# EAGLE board disp_adapter (EAGLE 5.07)
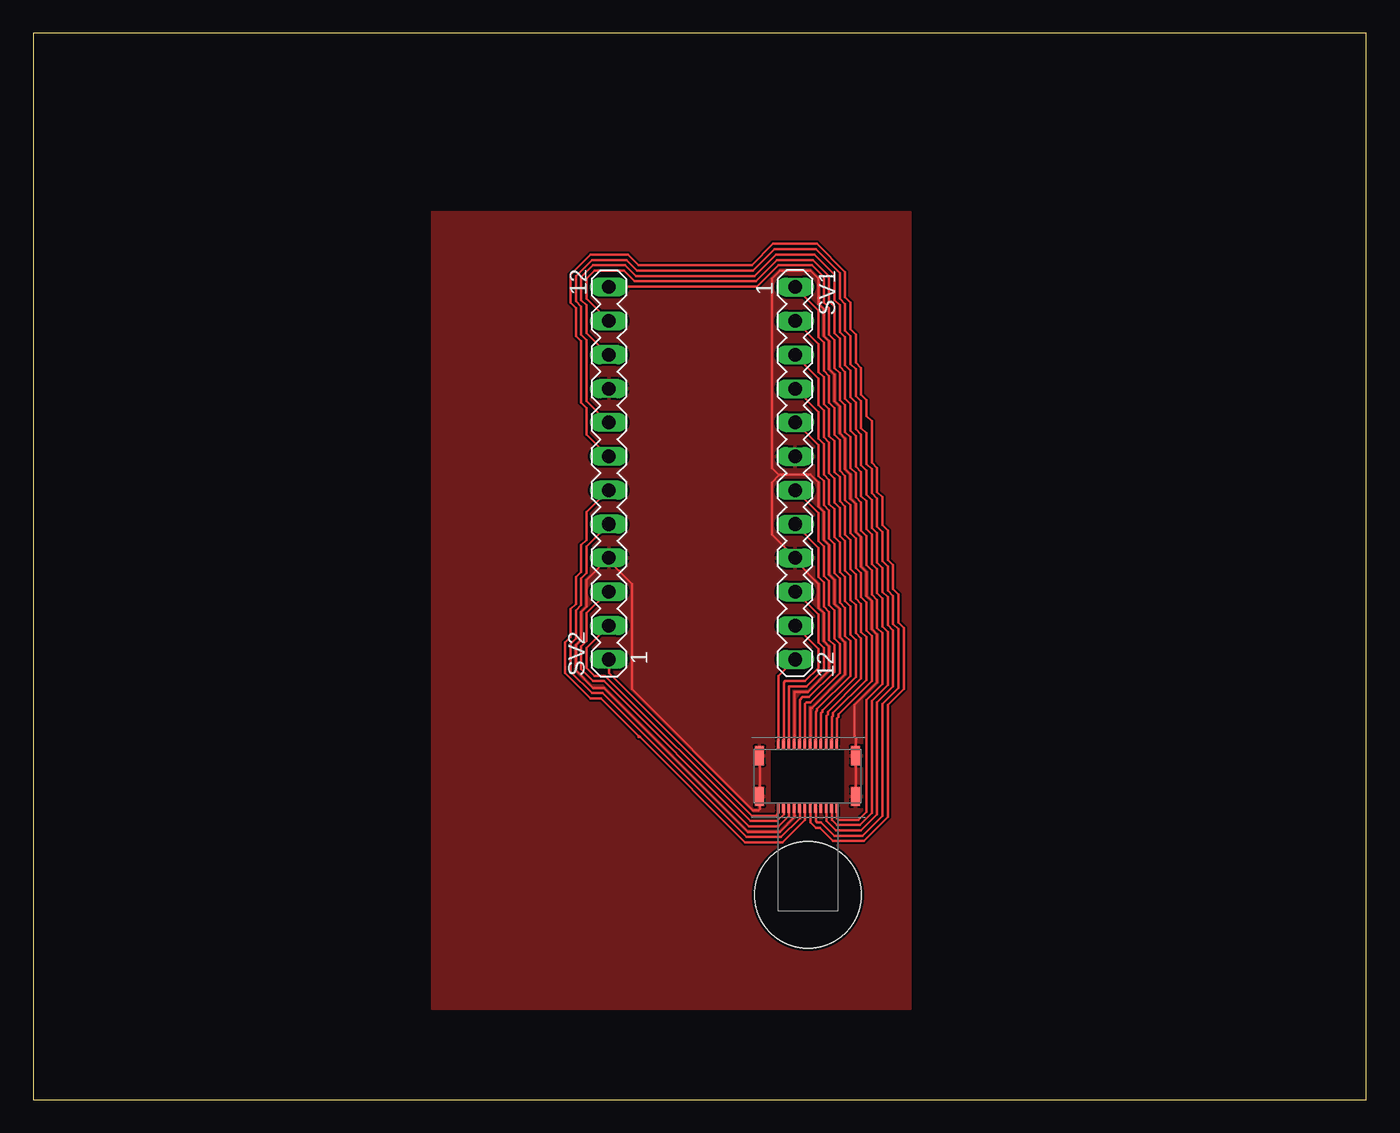
[diagram p0: board, top side]

Size 100 x 80 mm. Coordinates in mm from the lower left corner, seen from the top.
Outline: 0,0 100,0 100,80 0,80 0,0
Copper layers (1*16): Top 0.035mm / dielectric 1.5mm / Bottom 0.035mm
Design rules "Fischer-LP": minimum track width 0.15mm, minimum drill 0.3mm, track to track 0.15mm, track to pad 0.15mm, pad to pad 0.15mm, via to via 0.15mm, smd to smd 0mil, copper to edge 0.2mm, drill to drill 0.3mm, minimum pad ring 0.2mm, minimum via ring 0.15mm, stop-mask expansion 0.15mm, vias tented up to drill 0.5mm, thermal gap 0.15mm
Net classes: 0 default: width 0.2 mm

## Footprints (pad centres in the part's own frame; a part is rotated, then mirrored left to right if it is on the bottom)
MA12-1 = drill 1.016 long: 1 -13.97,0; 2 -11.43,0; 3 -8.89,0; 4 -6.35,0; 5 -3.81,0; 6 -1.27,0; 7 1.27,0; 8 3.81,0; 9 6.35,0; 10 8.89,0; 11 11.43,0; 12 13.97,0
SONY_ACX559AKN-7_A = smd 0.2 x 0.7: P$1 0,0; P$2 0.4,0; P$3 0.8,0; P$4 1.2,0; P$5 1.6,0; P$6 2,0; P$7 2.4,0; P$8 2.8,0; P$9 3.2,0; P$10 3.6,0; P$11 4,0; P$12 4.4,0; P$13 4.4,-4.8; P$14 4,-4.8; P$15 3.6,-4.8; P$16 3.2,-4.8; P$17 2.8,-4.8; P$18 2.4,-4.8; P$19 2,-4.8; P$20 1.6,-4.8; P$21 1.2,-4.8; P$22 0.8,-4.8; P$23 0.4,-4.8; P$24 0,-4.8 | smd 0.7 x 1.45: P$25 5.8,-0.875; P$26 5.8,-3.925; P$27 -1.4,-3.925; P$28 -1.4,-0.875 | hole 8: 2.25,-11.3

## Placement (x,y rotation side)
SV1  [MA12-1]  57.15,46.99 270 top
SV2  [MA12-1]  43.18,46.99 90 top
U$1  SONY_ACX559AKN-7DN  [SONY_ACX559AKN-7_A]  55.88,26.67 0 top

## Library data of the parts
SV1 SV2 = con-lstb
U$1 = Fabian

## Nets
N$1: SV1.1 U$1.P$12
N$2: SV1.2 U$1.P$11
N$3: SV1.3 U$1.P$10
N$4: SV1.4 U$1.P$9
N$5: SV1.5 U$1.P$8
N$7: SV1.7 U$1.P$6
N$8: SV1.8 U$1.P$5
N$10: SV1.10 U$1.P$3
N$11: SV1.11 U$1.P$2
N$12: SV1.12 U$1.P$1
N$13: SV2.1 U$1.P$24
N$14: SV2.2 U$1.P$23
N$15: SV2.3 U$1.P$22
N$17: SV2.5 U$1.P$20
N$18: SV2.6 U$1.P$19
N$19: SV2.7 U$1.P$18
N$20: SV2.8 U$1.P$17
N$21: SV1.6 SV1.9 SV2.4 SV2.9 U$1.P$4 U$1.P$7 U$1.P$16 U$1.P$21 U$1.P$25 U$1.P$26 U$1.P$27 U$1.P$28
N$22: SV2.10 U$1.P$15
N$23: SV2.11 U$1.P$14
N$24: SV2.12 U$1.P$13

## Tracks (layer width: path | path; a pad name or v marks a point on that pad's centre or on a via)
N$1
  Top 0.2: U$1.P$12 60.3,26.7 60.3,28.6 60.4,28.7 60.4,28.9 62.9,31.4 62.9,34.8 62.5,35.2 62.5,37.3 62.1,37.7 62.1,39.5 61.7,39.9 61.7,42.1 61.3,42.5 61.3,44.6 60.9,45 60.9,46.8 60.5,47.2 60.5,49.5 60.1,49.9 60.1,51.9 59.7,52.3 59.7,54.3 59.3,54.7 59.3,56.8 58.9,57.2 58.9,59.2 57.2,60.9 SV1.1
N$2
  Top 0.2: U$1.P$11 59.9,26.7 59.9,28.7 60,28.8 60,29 62.5,31.5 62.5,34.7 62.1,35.1 62.1,37.2 61.7,37.6 61.7,39.4 61.3,39.8 61.3,42 60.9,42.4 60.9,44.5 60.5,44.9 60.5,46.7 60.1,47.1 60.1,49.4 59.7,49.8 59.7,51.8 59.3,52.2 59.3,54.2 58.9,54.6 58.9,56.7 57.2,58.4 SV1.2
N$3
  Top 0.2: U$1.P$10 59.5,26.7 59.5,28.8 59.6,28.9 59.6,29.1 62.1,31.6 62.1,34.6 61.7,35 61.7,37.1 61.3,37.5 61.3,39.3 60.9,39.7 60.9,41.9 60.5,42.3 60.5,44.4 60.1,44.8 60.1,46.6 59.7,47 59.7,49.3 59.3,49.7 59.3,51.7 58.9,52.1 58.9,54.1 57.2,55.8 SV1.3
N$4
  Top 0.2: U$1.P$9 59.1,26.7 59.1,29 59.2,29.1 59.2,29.2 61.7,31.7 61.7,34.5 61.3,34.9 61.3,37 60.9,37.4 60.9,39.2 60.5,39.6 60.5,41.8 60.1,42.2 60.1,44.3 59.7,44.7 59.7,46.5 59.3,46.9 59.3,49.2 58.9,49.6 58.9,51.6 57.2,53.3 SV1.4
N$5
  Top 0.2: U$1.P$8 58.7,26.7 58.7,29.1 58.8,29.2 58.8,29.3 61.3,31.8 61.3,34.4 60.9,34.8 60.9,36.9 60.5,37.3 60.5,39.1 60.1,39.5 60.1,41.7 59.7,42.1 59.7,44.2 59.3,44.6 59.3,46.4 58.9,46.8 58.9,49.1 57.2,50.8 SV1.5
N$7
  Top 0.2: U$1.P$6 57.9,26.7 57.9,29.7 58,29.8 58.3,29.8 60.5,32 60.5,34.2 60.1,34.6 60.1,36.7 59.7,37.1 59.7,38.9 59.3,39.3 59.3,41.5 58.9,41.9 58.9,44 57.2,45.7 SV1.7
N$8
  Top 0.2: U$1.P$5 57.5,26.7 57.5,30 57.7,30.2 58.2,30.2 60.1,32.1 60.1,34.1 59.7,34.5 59.7,36.6 59.3,37 59.3,38.8 58.9,39.2 58.9,41.4 57.2,43.1 SV1.8
N$10
  Top 0.2: U$1.P$3 56.7,26.7 56.7,31 58,31 59.3,32.3 59.3,33.9 58.9,34.3 58.9,36.4 57.2,38.1 SV1.10
N$11
  Top 0.2: U$1.P$2 56.3,26.7 56.3,31.3 56.4,31.4 57.9,31.4 58.9,32.4 58.9,33.8 57.2,35.5 SV1.11
N$12
  Top 0.2: U$1.P$1 55.9,26.7 55.9,31.8 57.1,33 SV1.12
N$13
  Top 0.2: SV2.1 43.2,33 43.2,32 53.9,21.3 55.7,21.3 55.9,21.5 55.9,21.8 U$1.P$24
N$14
  Top 0.2: U$1.P$23 56.3,21.8 56.3,21.4 55.8,20.9 53.8,20.9 42.9,31.8 42.1,31.8 41.5,32.4 41.5,33.9 43.1,35.5 SV2.2
N$15
  Top 0.2: U$1.P$22 56.7,21.8 56.7,21.3 55.9,20.5 53.7,20.5 42.8,31.4 42,31.4 41.1,32.3 41.1,34 41.5,34.4 41.5,36.5 43.1,38.1 SV2.3
N$17
  Top 0.2: U$1.P$20 57.5,21.8 57.5,21.1 56.1,19.7 53.5,19.7 42.7,30.5 41.9,30.5 40.3,32.1 40.3,34.2 40.7,34.6 40.7,36.7 41.1,37.1 41.1,39.1 41.5,39.5 41.5,41.5 SV2.5
N$18
  Top 0.2: U$1.P$19 57.9,21.8 57.9,21 56.2,19.3 53.4,19.3 45.5,27.2 45.4,27.2 45.4,27.3 42.6,30.1 41.8,30.1 39.9,32 39.9,34.3 40.3,34.7 40.3,36.8 40.7,37.2 40.7,39.2 41.1,39.6 41.1,41.6 41.5,42 41.5,44.1 43.1,45.7 SV2.6
N$19
  Top 0.2: U$1.P$18 58.3,21.8 58.3,20.8 58.7,20.4 59,20.4 60,19.4 62.3,19.4 64.1,21.2 64.1,29.6 65.3,30.8 65.3,35.4 64.9,35.8 64.9,37.9 64.5,38.3 64.5,40.1 64.1,40.5 64.1,42.7 63.7,43.1 63.7,45.2 63.3,45.6 63.3,47.4 62.9,47.8 62.9,50.9 62.5,51.3 62.5,52.5 62.1,52.9 62.1,54.9 61.7,55.3 61.7,57.4 61.3,57.8 61.3,59.8 60.9,60.2 60.9,62.1 58.8,64.2 55.5,64.2 53.9,62.6 45.4,62.6 44.6,63.4 41.8,63.4 40.3,61.9 40.3,59.8 40.7,59.4 40.7,57.3 41.1,56.9 41.1,52.3 41.5,51.9 41.5,49.9 43.1,48.3 SV2.7
N$20
  Top 0.2: U$1.P$17 58.7,21.8 58.7,20.9 58.8,20.8 59.1,20.8 60.1,19.8 62.2,19.8 63.7,21.3 63.7,29.7 64.9,30.9 64.9,35.3 64.5,35.7 64.5,37.8 64.1,38.2 64.1,40 63.7,40.4 63.7,42.6 63.3,43 63.3,45.1 62.9,45.5 62.9,47.3 62.5,47.7 62.5,50 62.1,50.4 62.1,52.4 61.7,52.8 61.7,54.8 61.3,55.2 61.3,57.3 60.9,57.7 60.9,59.7 60.5,60.1 60.5,62 58.7,63.8 55.6,63.8 54,62.2 45.3,62.2 44.5,63 41.9,63 40.7,61.8 40.7,59.9 41.1,59.5 41.1,57.4 41.5,57 41.5,52.4 43.1,50.8 SV2.8
N$21
  Top 0.2: U$1.P$28 54.5,25.7 54.5,22.8 U$1.P$27 54.5,22.7 54.5,21.8 54.4,21.7 54,21.7 44.9,30.8 44.9,38.7 43.1,40.5 SV2.4 43.1,40.6 41.5,39 41.5,37 41.1,36.6 41.1,34.5 40.7,34.1 40.7,32.2 42,30.9 42.8,30.9 53.6,20.1 56,20.1 57.1,21.2 57.1,21.8 U$1.P$21 | U$1.P$26 61.7,22.8 61.7,25.7 U$1.P$25 61.7,25.9 61.7,27.1 61.6,27.2 61.6,29.6 63.3,31.3 63.3,34.9 62.9,35.3 62.9,37.4 62.5,37.8 62.5,39.6 62.1,40 62.1,42.2 61.7,42.6 61.7,44.7 61.3,45.1 61.3,46.9 60.9,47.3 60.9,49.6 60.5,50 60.5,52 60.1,52.4 60.1,54.4 59.7,54.8 59.7,56.9 59.3,57.3 59.3,59.3 58.9,59.7 58.9,61.6 58.3,62.2 56,62.2 55.4,61.6 55.4,47.4 55.95,46.85 | U$1.P$4 57.1,26.7 57.1,30.6 58.1,30.6 59.7,32.2 59.7,34 59.3,34.4 59.3,36.5 58.9,36.9 58.9,38.7 57.2,40.4 57.2,40.6 SV1.9 57.1,40.7 55.4,42.4 55.4,46.3 55.95,46.85 | U$1.P$7 58.3,26.7 58.3,29.4 58.4,29.4 60.9,31.9 60.9,34.3 60.5,34.7 60.5,36.8 60.1,37.2 60.1,39 59.7,39.4 59.7,41.6 59.3,42 59.3,44.1 58.9,44.5 58.9,46.3 58.3,46.9 56,46.9 55.95,46.85
  pour Top: 29.9,66.6 65.8,66.6 65.8,6.8 29.9,6.8
N$22
  Top 0.2: U$1.P$15 59.5,21.8 59.5,20.9 60.2,20.2 62.1,20.2 63.3,21.4 63.3,29.8 64.5,31 64.5,35.2 64.1,35.6 64.1,37.7 63.7,38.1 63.7,39.9 63.3,40.3 63.3,42.5 62.9,42.9 62.9,45 62.5,45.4 62.5,47.2 62.1,47.6 62.1,49.9 61.7,50.3 61.7,52.3 61.3,52.7 61.3,54.7 60.9,55.1 60.9,57.2 60.5,57.6 60.5,59.6 60.1,60 60.1,61.9 58.6,63.4 55.7,63.4 54.1,61.8 45.2,61.8 44.4,62.6 42,62.6 41.1,61.7 41.1,60 41.5,59.6 41.5,57.5 43.1,55.9 SV2.10
N$23
  Top 0.2: U$1.P$14 59.9,21.8 59.9,21 60.3,20.6 62,20.6 62.9,21.5 62.9,29.9 64.1,31.1 64.1,35.1 63.7,35.5 63.7,37.6 63.3,38 63.3,39.8 62.9,40.2 62.9,42.4 62.5,42.8 62.5,44.9 62.1,45.3 62.1,47.1 61.7,47.5 61.7,49.8 61.3,50.2 61.3,52.2 60.9,52.6 60.9,54.6 60.5,55 60.5,57.1 60.1,57.5 60.1,59.5 59.7,59.9 59.7,61.8 58.5,63 55.8,63 54.2,61.4 45.1,61.4 44.3,62.2 42.1,62.2 41.5,61.6 41.5,60.1 SV2.11
N$24
  Top 0.2: U$1.P$13 60.3,21.8 60.3,21.1 60.4,21 61.9,21 62.5,21.6 62.5,30 63.7,31.2 63.7,35 63.3,35.4 63.3,37.5 62.9,37.9 62.9,39.7 62.5,40.1 62.5,42.3 62.1,42.7 62.1,44.8 61.7,45.2 61.7,47 61.3,47.4 61.3,49.7 60.9,50.1 60.9,52.1 60.5,52.5 60.5,54.5 60.1,54.9 60.1,57 59.7,57.4 59.7,59.4 59.3,59.8 59.3,61.7 58.4,62.6 55.9,62.6 54.3,61 43.2,61 SV2.12